# Altium PCB ESP32_DevBoard_T.PcbDoc
Units mm, origin at the board's own origin, x right, y up, seen from the top; angles counter-clockwise.
Board outline 118.7 x 64.5 mm, 2 copper layers (Top Layer, Bottom Layer); 62 components, 59 nets, 233 pads, 63 vias.
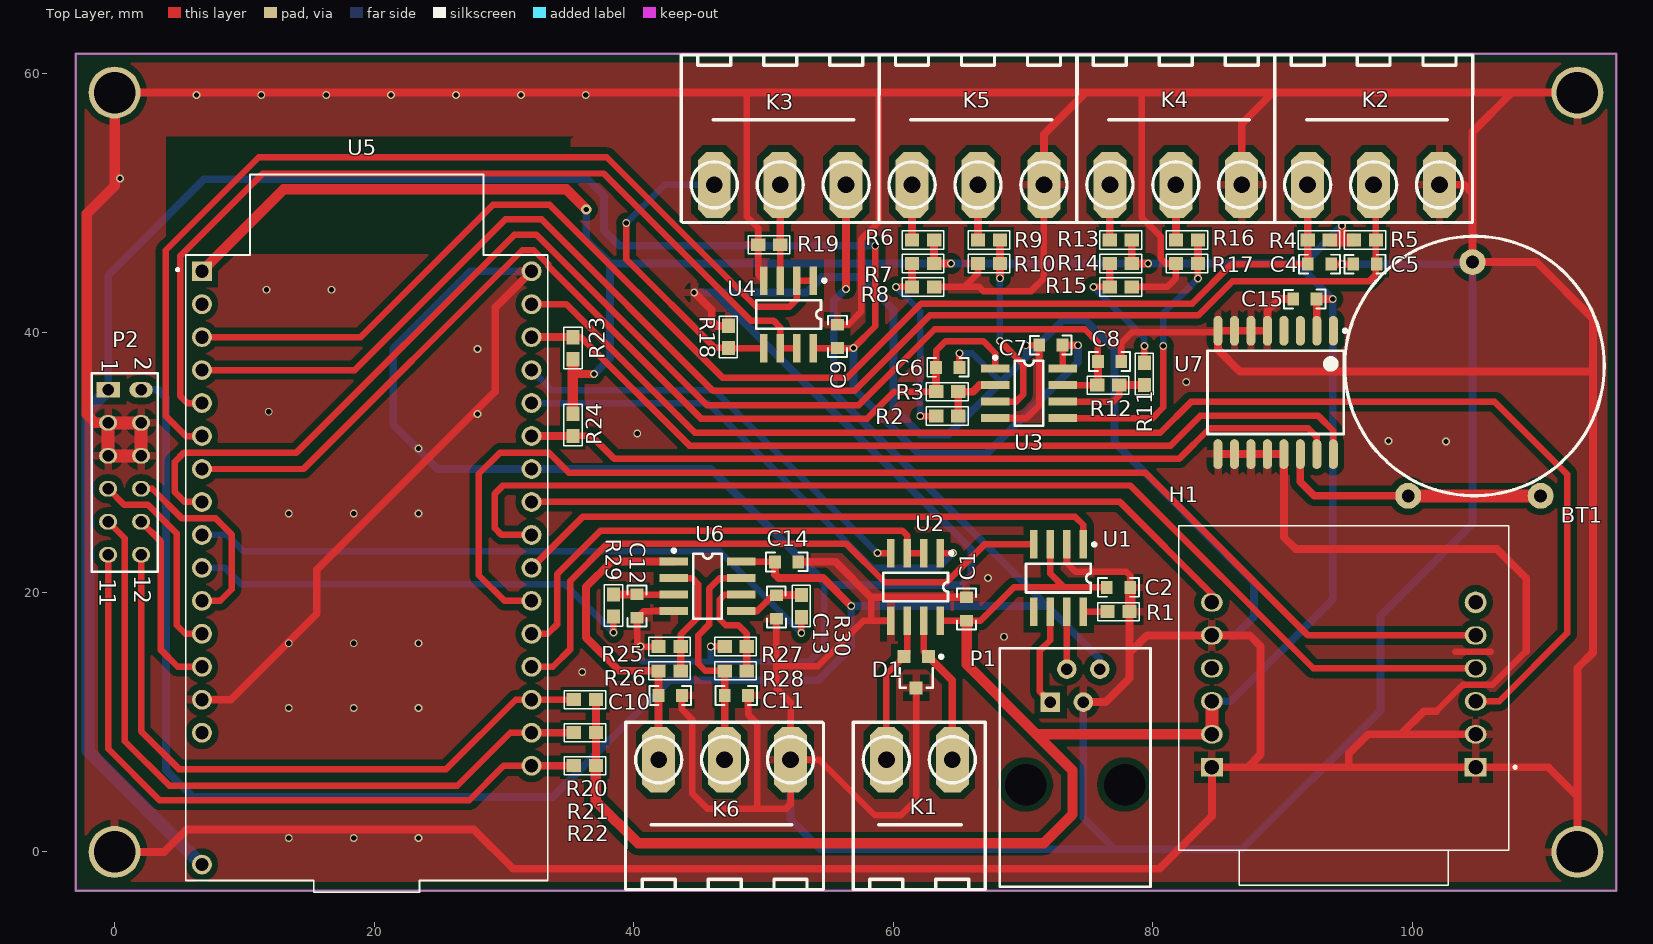
[diagram p0: Top Layer view]
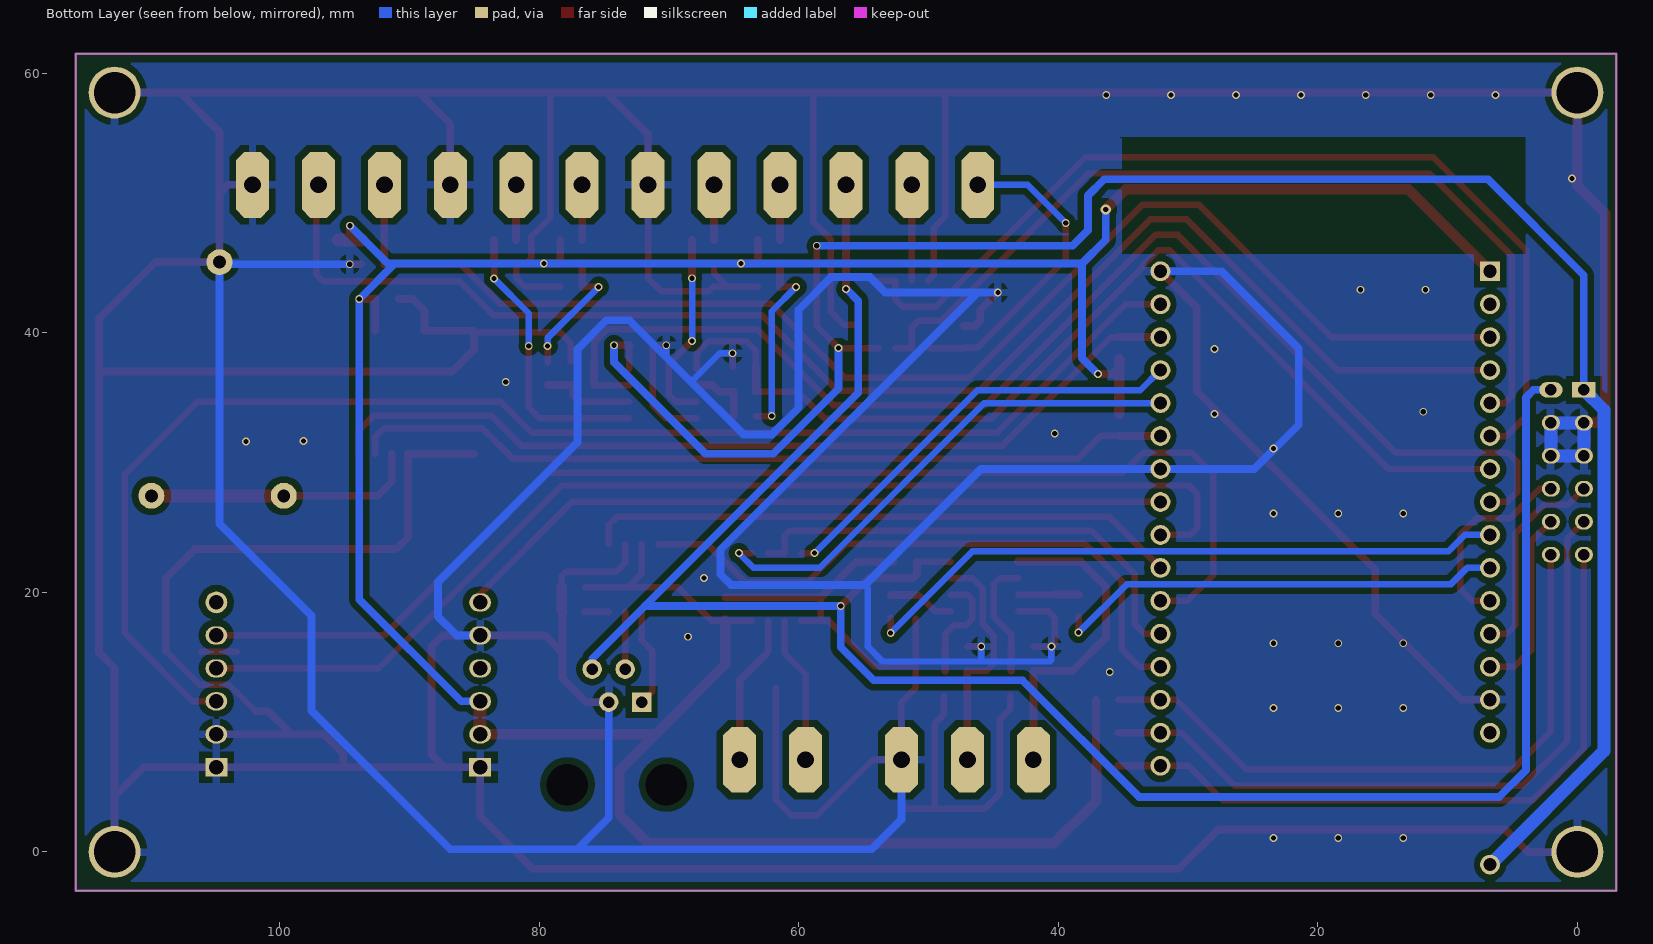
[diagram p1: Bottom Layer view, seen from below]
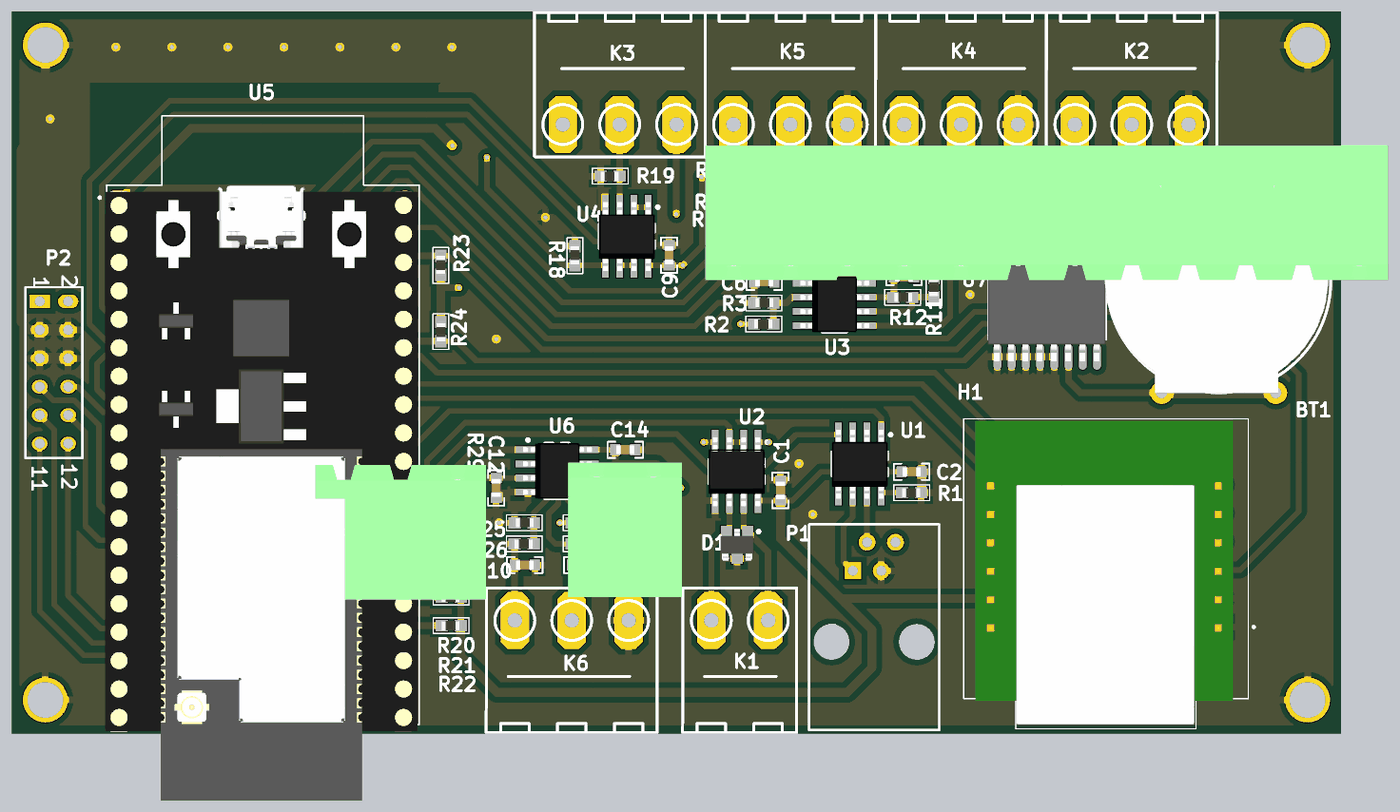
[diagram p2: 3D render of the assembled board from above, using the file's embedded part models]

## Layer stack, top to bottom
Top Layer: signal copper 0.0356
Dielectric: dielectric 0.32, FR-4, Dk 4.8
Bottom Layer: signal copper 0.0356

## Board outline
-3,-3 -3,61.5 115.7,61.5 115.7,-3

## Design rules (kind name [scope] priority, off if disabled: settings)
Clearance [All] p1: gap=0.5
PlaneConnect [All] p1: planeconnectstyle=Relief reliefexpansion=0.508 reliefentries=4 reliefconductorwidth=0.6 reliefairgap=0.254
PolygonConnect [All] p1: connectstyle=Relief reliefconductorwidth=0.6 reliefentries=4 polygonreliefangle="90 Angle"
RoutingVias [All] p1: holewidth=0.711 width=1.27 viastyle="Through Hole" minholewidth=0.711 minwidth=1.27 maxholewidth=0.711 maxwidth=1.27
SilkscreenOverComponentPads [All] p1: minsilkscreentomaskgap=0.254
SolderMaskExpansion [All] p1: expansion=0.102
TestPointUsage [All] p1: valid=0 allowmultiple=FALSE
Testpoint [All] p1: side=15 testpointundercomponent=TRUE minsize=1.016 maxsize=2.54 preferedsize=1.524 minholesize=0 maxholesize=1.016 preferedholesize=0.813 testpointgrid=0.025 style=1023 order=0123456789
Width [All] p1: maxlimit=1 minlimit=0.254 preferedwidth=0.6
22 further rules are at their usual default settings.

## Classes and differential pairs
component class Communication: C1 C2 C3 D1 H1 K1 P1 R1 U1 U2
component class Connector: P2
component class Input_Analog: C4 C5 C6 C7 C8 C9 D2 D3 K2 K3 K4 K5 R2 R3 R4 R5 R6 R7 R8 R9 R10 R11 R12 R13 R14 R15 R16 R17 R18 R19 U3 U4
component class Module_Esp32: R20 R21 R22 R23 R24 U5
component class Output_Analog: C10 C11 C12 C13 C14 K6 R25 R26 R27 R28 R29 R30 U6
component class Peripheral: BT1 C15 U7

## Components (designator, comment, footprint, x,y, rotation, side; value= is the part's Value field where it differs from the comment)
BT1 "CR2032" CR2032 104.77,37.44 r90 top
C1 "100nF/6.3V" CAP0603W 65.64,18.72 r270 top
C2 "100nF/6.3V" CAP0603W 77.35,20.38 r180 top
C4 "100nF/6.3V" CAP0603W 92.828,45.289 r0 top
C5 "100nF/6.3V" CAP0603W 96.334,45.279 r180 top
C6 "?nF/6.3V" CAP0603W 64.19,37.34 r0 top
C7 "100nF/6.3V" CAP0603W 72.13,39.04 r180 top
C8 "?nF/6.3V" CAP0603W 76.66,37.78 r0 top
C9 "100nF/6.3V" CAP0603W 55.69,39.72 r90 top
C10 "1uF/6.3V" CAP0603W 42.81,12.05 r180 top
C11 "1uF/6.3V" CAP0603W 47.9,12.05 r180 top
C12 "1uF/6.3V" CAP0603W 40.25,18.94 r90 top
C13 "1uF/6.3V" CAP0603W 50.98,18.87 r90 top
C14 "100nF/6.3V" CAP0603W 51.78,22.35 r0 top
C15 "100nF/6.3V" CAP0603W 91.7,42.59 r180 top
D1 "SM712" "SOT23 - BC8X6" 61.76,13.84 r180 top
H1 "WIZ850IO" WIZ850IO 95,11.272 r180 top
K1 "2EDGR-5.08-02P" CON_DG129_02P 62,7.1 r0 top
K2 "2EDGR-5.08-03P" CON_DG129_03P 97,51.4 r180 top
K3 "2EDGR-5.08-03P" CON_DG129_03P 51.28,51.4 r180 top
K4 "2EDGR-5.08-03P" CON_DG129_03P 81.76,51.4 r180 top
K5 "2EDGR-5.08-03P" CON_DG129_03P 66.52,51.4 r180 top
K6 "2EDGR-5.08-03P" CON_DG129_03P 47,7.1 r0 top
P1 "RJ12 Jack" rj12_90deg_con_4p4c 74,9.636 r0 top
P2 "Header 6X2" HDR2X6 -0.5,35.6 r270 top
R1 "10K" RES1608[0603] 77.35,18.51 r180 top
R2 "?K" RES1608[0603] 64.15,33.58 r180 top
R3 "?K" RES1608[0603] 64.15,35.46 r0 top
R4 "10K" RES1608[0603] 92.778,47.14 r180 top
R5 "10K" RES1608[0603] 96.334,47.14 r0 top
R6 "?K" RES1608[0603] 62.29,47.14 r0 top
R7 "?K" RES1608[0603] 62.29,45.335 r0 top
R8 "?K" RES1608[0603] 62.29,43.53 r180 top
R9 "?K" RES1608[0603] 67.37,47.14 r180 top
R10 "?K" RES1608[0603] 67.37,45.335 r0 top
R11 "?K" RES1608[0603] 79.34,36.83 r90 top
R12 "?K" RES1608[0603] 76.55,35.96 r0 top
R13 "?K" RES1608[0603] 77.52,47.14 r0 top
R14 "?K" RES1608[0603] 77.52,45.335 r0 top
R15 "?K" RES1608[0603] 77.52,43.53 r180 top
R16 "?K" RES1608[0603] 82.62,47.14 r180 top
R17 "?K" RES1608[0603] 82.62,45.335 r0 top
R18 "165R" RES1608[0603] 47.29,39.68 r90 top
R19 "165R" RES1608[0603] 50.43,46.78 r180 top
R20 "4K7" RES1608[0603] 36.23,11.73 r180 top
R21 "4K7" RES1608[0603] 36.23,9.185 r180 top
R22 "4K7" RES1608[0603] 36.23,6.64 r180 top
R23 "4K7" RES1608[0603] 35.31,38.81 r90 top
R24 "4K7" RES1608[0603] 35.31,32.9 r270 top
R25 "4K7" RES1608[0603] 42.76,15.82 r0 top
R26 "10K" RES1608[0603] 42.76,13.95 r180 top
R27 "4K7" RES1608[0603] 47.85,15.82 r0 top
R28 "10K" RES1608[0603] 47.85,13.95 r180 top
R29 "4K7" RES1608[0603] 38.43,18.99 r90 top
R30 "4K7" RES1608[0603] 52.91,18.94 r90 top
U1 "SN65HVD230" SO8 72.72,21.09 r180 top
U2 "SN65HVD10" SO8 61.71,20.42 r180 top
U3 "LM358AD" SO8 70.45,35.33 r270 top
U4 "LM358AD" SO8 51.924,41.418 r180 top
U5 "ESP32-DEVKITC-32U" MODULE_ESP32-DEVKITC-32U 19.424,21.892 r0 top
U6 "LM358AD" SO8 45.69,20.46 r270 top
U7 "DS3231" SOIC16 89.452,35.4 r270 top

## Footprints (in the part's own frame and the unit in brackets; to place one, negate y for a bottom-side part, rotate by r counter-clockwise, add the part's x,y. Pads: shape width x height; smd on the part's side, far side on the other; paste and mask are expansions set on the pad)
CAP0603W [mm] "capacitor 0603 wave soldering"
  rect 0.9x1 smd: 1(-0.9,0) 2(0.9,0)
  silkscreen extent -1.58,-0.73 1.59,0.72, body extent -0.8,-0.4 0.8,0.4, height 0.3
CON_DG129_02P [mm] "Klemens 2'li"
  oct 2.54x5.08 hole 1.3: 1(2.54,0) 2(-2.54,0)
  silkscreen extent -5.1,-10 5.08,2.9, body extent -5.15,-9.9 5.01,2.1, height 8.6
CON_DG129_03P [mm] "Klemens 3'lü"
  oct 2.54x5.08 hole 1.3: 1(5.08,0) 2(0,0) 3(-5.08,0)
  silkscreen extent -7.64,-10 7.62,2.9, body extent -7.65,-10.13 7.59,1.88, height 8.6
CR2032 [mm] "3V Battery"
  round 2 hole 1: 1(-10,-5.1) 1(-10,5.1) 2(8,0.15)
  silkscreen extent -10,-10 10,10, body extent -10.05,-9.8 10.2,10.2, height 2.97
HDR2X6 [mm]
  rect 1.2x1.8 hole 0.9: 1(0,0)
  oval 1.2x1.8 hole 0.9: 2(0,2.54)
  oval 1.2x1.4 hole 0.9: 3(2.54,0) 4(2.54,2.54) 5(5.08,0) 6(5.08,2.54) 7(7.62,0) 8(7.62,2.54) 9(10.16,0) 10(10.16,2.54) 11(12.7,0) 12(12.7,2.54)
  silkscreen extent -1.27,-1.27 14,3.81
MODULE_ESP32-DEVKITC-32U [mm]
  rect 1.53x1.53 hole 1.02: 1(-12.7,22.85)
  round 1.53 hole 1.02: 2(-12.7,20.31) 3(-12.7,17.77) 4(-12.7,15.23) 5(-12.7,12.69) 6(-12.7,10.15) 7(-12.7,7.61) 8(-12.7,5.07) 9(-12.7,2.53) 10(-12.7,-0.01) 11(-12.7,-2.55) 12(-12.7,-5.09) 13(-12.7,-7.63) 14(-12.7,-10.17) 15(-12.7,-12.71) 19(-12.7,-22.87) 23(12.7,-15.25) 24(12.7,-12.71) 25(12.7,-10.17) 26(12.7,-7.63) 27(12.7,-5.09) 28(12.7,-2.55) 29(12.7,-0.01) 30(12.7,2.53) 31(12.7,5.07) 32(12.7,7.61) 33(12.7,10.15) 34(12.7,12.69) 35(12.7,15.23) 36(12.7,17.77) 37(12.7,20.31) 38(12.7,22.85)
  silkscreen extent -14.67,-25 13.95,30.3, body extent -14.09,-25.21 13.81,29.71, height 7.95
RES1608[0603] [mm] "Chip Capacitor; Body 1.6 x 0.8 mm (LxW typ)"
  rect 1.1x1 smd: 1(-0.85,0) 2(0.85,0)
  silkscreen extent -1.6,-0.7 1.6,0.7, body extent -0.75,-0.41 0.85,0.44, height 0.6
rj12_90deg_con_4p4c [mm] "CONNECTOR, RJ12 90 Degree, PCB Type"
  rect 1.5x1.5 hole 0.9: 1(-1.905,1.905)
  round 1.5 hole 0.9: 2(-0.635,4.445) 3(0.635,1.905) 4(1.905,4.445)
  round 0 hole 3.2 unplated: ""(-3.81,-4.445) ""(3.81,-4.445)
  silkscreen extent -5.81,-12.32 5.81,6.05
SO8 [mm]
  rect 0.6x2.2 smd: 1(-1.905,-2.6) 2(-0.635,-2.6) 3(0.635,-2.6) 4(1.905,-2.6) 5(1.905,2.6) 6(0.635,2.6) 7(-0.635,2.6) 8(-1.905,2.6)
  silkscreen extent -2.88,-2.72 2.5,1.1, body extent -2.5,-3.05 2.5,3.12, height 2
SOIC16 [mm] "SOIC, 16-Leads, Body 10.3x7.5mm, Pitch 1.27mm, IPC Low Density"
  oval 2.3x0.7 smd: 1(-4.75,4.445) 2(-4.75,3.175) 3(-4.75,1.905) 4(-4.75,0.635) 5(-4.75,-0.635) 6(-4.75,-1.905) 7(-4.75,-3.175) 8(-4.75,-4.445) 9(4.75,-4.445) 10(4.75,-3.175) 11(4.75,-1.905) 12(4.75,-0.635) 13(4.75,0.635) 14(4.75,1.905) 15(4.75,3.175) 16(4.75,4.445)
  silkscreen extent -4.87,-5.25 3.2,5.47, body extent -5.47,-5.3 5.17,5.2, height 2.62
"SOT23 - BC8X6" [mm] "SOT-23; 3 Leads; Body 3.0 x 2.5 mm, inc. leads (LxW max)"
  rect 1x1 smd: 1(-0.95,-1.2) 2(0.95,-1.2) 3(0,1.2)
  silkscreen extent -2.05,-1.32 1.28,1.2, body extent -1.5,-1.44 1.5,1.4, height 1.2
WIZ850IO [mm]
  rect 1.68x1.4 hole 1.12: 1(-9.86,4.75) 7(10.46,4.75)
  oval 1.68x1.4 hole 1.12: 2(-9.86,2.21) 3(-9.86,-0.33) 4(-9.86,-2.87) 5(-9.86,-5.41) 8(10.46,2.21) 9(10.46,-0.33) 10(10.46,-2.87) 11(10.46,-5.41) 12(10.46,-7.95)
  round 1.68 hole 1.12: 6(-9.86,-7.95)
  silkscreen extent -13,-13.85 13,13.85, body extent -11.05,-13.65 11.95,13.45, height 17.9

## Part data
BT1: library part BATTERY_CR2032, "BATTERY CR2032 HORIZONTAL 3PIN"
C1 C2 C4 C5 C6 C7 C8 C9 C10 C11 C12 C13 C14 C15: library part CAP1, "CAPACITOR 0603 Case"
D1: "DIODE TVS Array For Rs485"
H1: "Ethernet - 10/100 Base-T/TX PHY SPI Interface Module"
K1: library part KLEMENS_2P, "CONNECTOR 5.08mm 2PIN 90DEG"
K2 K3 K4 K5 K6: library part KLEMENS_3P, "CONNECTOR 5.08mm 3PIN 90DEG"
P1: library part RJ12_4P4C, "CONNECTOR RJ12 Jack, 90 Degree"
P2: "CONNECTOR Header, 6-Pin, Dual row"
R1 R2 R3 R4 R5 R6 R7 R8 R9 R10 R11 R12 R13 R14 R15 R16 R17 R18 R19 R23 R24 R25 R26 R27 R28 R29 R30: library part RES, "RESISTOR 0603 Case %1"
R20 R21 R22: library part RES, "RESISTOR 0805 Case %1"
U1: "CAN Interface IC 3.3V CAN Transceiver"
U2: library part 75176, "IC SN65HVD10DR SMD SOIC8"
U3 U6: "OPAMP Low-Power Dual Operational Amplifier"
U4: "Low-Power Dual Operational Amplifier"
U5: "ESP32-DEVKITC"
U7: library part RTC_DS3231, "IC DS3231SN RTC W/TCXO 16-SOIC MAXIM"

## Free pads (board coordinates)
  round 4 hole 3.2: 4(0,0) 4(0,58.5) 4(112.7,0) 4(112.7,58.5)

## Via types
v1: diameter 0.6, hole 0.4, Top Layer to Bottom Layer, 62 vias
v2: diameter 0.8, hole 0.4, Top Layer to Bottom Layer, 1 vias

## Nets (pads, with @x,y where several pads share a name; then routed paths per layer and width w, separated by ;. In a path a pad name is that pad's centre, name@x,y a point inside that pad or via, vN(x,y) a via of type N, cw(c..) or ccw(c..) an arc to the next point about the centre after c; other vN are vias at no path point)
5V: C7.1 C9.1 P2.1 U3.8 U4.8 U5.19 | length 156.9
  Top Layer w0.5: U4.8 53.831,38.82 C9.1 v1(56.92,38.82) 58.61,40.51 v1(58.61,46.7) ; C7.1 73.05,39.02 U3.8
  Top Layer w0.6: C7.1 v1(74.22,39.04)
  Bottom Layer w0.6: P2.1 -0.5,44.43 6.89,51.82 36.46,51.82 37.71,50.57 37.71,47.89 38.9,46.7 v1(58.61,46.7) ; v1(56.92,38.82) 56.92,35.72 61.96,30.68 67.17,30.68 74.22,37.73 v1(74.22,39.04)
  Bottom Layer w1: P2.1 -2.046,34.054 -2.046,7.792 U5.19
24V: C14.1 K3.3 P1.4 P2.2 U6.8 | length 164.2
  Top Layer w0.5: U6.8 50.865,22.365 C14.1
  Top Layer w0.6: C14.1 50.88,21.38 51.15,21.11 54.58,21.11 v1(56.75,18.94) ; v1(56.34,43.38) 56.34,51.38 K3.3
  Bottom Layer w0.6: P2.2 3.37,35.6 3.96,35.01 3.96,6.3 6.02,4.24 33.78,4.24 42.76,13.22 54.2,13.22 56.75,15.77 v1(56.75,18.94) 71.85,18.94 ; v1(56.34,43.38) 55.41,42.45 55.41,35.38 71.85,18.94 ; P1.4 75.905,14.885 71.85,18.94
GND: BT1.2 C1.1 C2.1 C4.2 C5.2 C6.2 C7.2 C8.2 C9.2 C10.1 C11.1 C12.1 C13.1 C14.2 C15.2 D1.3 H1.1 H1.2 H1.7 H1.11 K2.3 K4.3 K5.3 K6.1 P1.3 P2.3 P2.4 P2.5 P2.6 pad.4 R1.1 R8.1 R10.1 R15.1 R17.1 R18.2 R19.2 R25.1 R27.1 U1.2 U2.5 U3.4 U4.4 U5.14 U5.32 U5.38 U6.4 U7.5 U7.6 U7.7 U7.8 U7.9 U7.10 U7.11 U7.12 U7.13 | length 1064.5
  Top Layer w0.5: R25.1 v1(40.52,15.82) 40.25,16.09 C12.1 40.765,18.555 U6.4 ; C10.1 43.71,10.99 44.49,10.21 44.49,4.51 45.66,3.34 49.46,3.34 ; v1(45.93,15.83) 46.99,15.83 R27.1 ; 48.63,58.5 48.72,58.41 48.72,48.93 49.58,48.07 R19.2 49.58,44.457 U4.4 ; C11.1 48.8,10.59 49.53,9.86 49.53,3.41 49.46,3.34 ; C13.1 50.98,14.3 ; C9.2 56.52,40.62 57.51,41.61 57.51,47.18 58.89,48.56 58.89,58.5 ; 58.27,19.62 58.28,19.61 58.28,17.82 ; U2.5 58.28,17.82 ; D1.3 61.76,4.01 60.58,2.83 58.56,2.83 54.29,7.1 K6.1 ; R8.1 65.47,43.53 ; C6.2 v1(65.09,38.42) ; R10.1 66.52,44.58 65.47,43.53 ; U3.4 70.255,33.425 71.23,34.4 C7.2 v1(70.2,39.04) ; K5.3 71.6,44.2 70.61,43.21 66.93,43.21 66.61,43.53 65.47,43.53 ; U1.2 73.355,22.275 74.04,21.59 77.93,21.59 78.25,21.27 C2.1 ; C8.2 77.56,39.21 78.4,40.05 84.907,40.05 U7.8 ; R15.1 81.11,43.53 81.77,44.19 R17.1 81.005,45.335 80.6,45.74 80.6,47.42 79.15,48.87 79.15,58.5 ; 101.82,10.84 103.868,12.888 106.168,12.888 108.76,15.48 ; 103.28,15.42 106.03,15.42 ; 49.46,3.34 51.73,3.34 52.08,3.69 K6.1 ; 50.98,14.3 50.98,12.63 52.08,11.53 K6.1 ; 50.98,14.3 54.17,14.3 57.69,17.82 58.28,17.82
  Top Layer w0.6: pad.4@0,0 3.82,0 5.54,1.72 27.69,1.72 30.7,-1.29 80.51,-1.29 84.54,2.74 H1.7 87.312,6.522 ; pad.4@0,58.5 48.63,58.5 58.89,58.5 74.8,58.5 ; U5.14 8.942,11.722 15.58,18.36 15.58,21.73 29.33,35.48 29.33,41.948 U5.38 ; v1(44.65,43.1) 46,41.75 46,40.94 46.41,40.53 R18.2 ; C14.2 55.54,22.35 58.27,19.62 C1.1 ; K5.3 71.6,55.3 74.8,58.5 ; P1.3 76.341,11.541 78.2,13.4 78.2,15.34 ; R1.1 78.2,15.34 ; U7.9 U7.10 U7.11 U7.12 U7.13 90.087,24.253 91,23.34 106.5,23.34 108.76,21.08 108.76,15.48 ; K4.3 86.84,56.11 89.23,58.5 ; C15.2 89.72,42.59 88.817,41.687 U7.5 U7.6 U7.7 U7.8 85.007,38.713 86.7,37.02 113.91,37.02 ; C4.2 93.738,45.279 v1(94.59,45.279) C5.2 ; 101.82,10.84 100.878,10.84 99.1,9.062 ; K2.3 103.99,51.4 104.62,50.77 ; H1.2 99.1,9.062 ; pad.4@112.7,0 112.7,4.29 ; pad.4@112.7,58.5 107.65,58.5 ; 74.8,58.5 79.15,58.5 89.23,58.5 ; 78.2,15.34 79.542,16.682 H1.11 87.448,16.682 88.29,15.84 88.29,7.5 87.312,6.522 ; 87.312,6.522 95.08,6.522 ; 89.23,58.5 107.65,58.5 ; 95.08,6.522 H1.1 110.468,6.522 112.7,4.29 ; 95.08,6.522 95.08,7.56 96.582,9.062 99.1,9.062 ; 104.62,50.77 BT1.2 109.56,45.44 113.91,41.09 113.91,37.02 ; 104.62,50.77 104.62,55.47 107.65,58.5 ; 112.7,4.29 112.7,14.15 113.91,15.36 113.91,37.02
  Top Layer w0.8: P2.3 -1.486,33.06 -2.146,33.72 -2.146,49.164 0,51.31 pad.4@0,58.5 ; R1.1 78.25,18.56 C2.1
  Top Layer w1: P2.5 P2.6 P2.4 P2.3 P2.5
  Bottom Layer w0.5: v1(40.52,15.82) 40.52,14.81 40.66,14.67 53.53,14.67 54.66,15.8 54.66,20.33 54.89,20.56 ; 45.93,14.67 v1(45.93,15.83) ; v1(65.09,38.42) 66.07,38.42 68.225,36.265 68.345,36.265 ; 70.19,38.11 70.2,38.12 v1(70.2,39.04)
  Bottom Layer w0.6: U5.38 27.422,44.742 21.47,38.79 21.47,32.92 24.888,29.502 U5.32 45.948,29.502 54.89,20.56 65.2,20.56 66.03,21.39 66.03,23.28 46.21,43.1 ; v1(44.65,43.1) 46.21,43.1 ; K6.1 52.08,2.5 54.38,0.2 77.07,0.2 ; 70.19,38.11 68.345,36.265 64.25,32.17 62.05,32.17 60,34.22 60,41.78 57.49,44.29 54.51,44.29 53.32,43.1 46.21,43.1 ; 70.2,38.12 73.04,40.96 74.82,40.96 77.04,38.74 77.04,31.55 87.79,20.8 87.79,18.13 86.342,16.682 H1.11 ; P1.3 74.635,2.635 77.07,0.2 ; v1(94.59,45.279) 104.459,45.279 BT1.2 104.62,25.29 97.54,18.21 97.54,10.9 86.84,0.2 77.07,0.2
  Bottom Layer w1: P2.5 P2.6 P2.4 P2.3 P2.5
  other v1: 13.42,16.08 23.42,31.08 27.95,33.74 0.42,51.89 6.3,58.31 11.3,58.31 16.3,58.31 21.3,58.31 26.3,58.31 31.3,58.31 36.3,58.31
NetBT1_1: BT1.1 U7.14 | length 21.1
  Top Layer w0.6: U7.14 91.357,28.513 92.43,27.44 BT1.1@99.67,27.44
  Top Layer w1: BT1.1@99.67,27.44 BT1.1@109.87,27.44
NetC4_1: C4.1 K2.1 R4.2 U5.3 | length 104.7
  Top Layer w0.5: U5.3 18.952,39.662 29.14,49.85 33.53,49.85 46.83,36.55 56.44,36.55 62.13,42.24 83.01,42.24 86.059,45.289 C4.1
  Top Layer w0.6: K2.1 91.928,51.392 C4.1
NetC5_1: C5.1 K2.2 R5.2 U5.4 | length 110.1
  Top Layer w0.5: U5.4 18.492,37.122 30.1,48.73 32.9,48.73 46.11,35.52 56.99,35.52 62.8,41.33 83.48,41.33 86.1,43.95 96.62,43.95 97.184,44.514 K2.2@97.184,49.84
  Top Layer w0.6: K2.2 K2.2@97.184,51.216
NetC6_1: C6.1 R3.1 U3.1 U5.7 | length 79.4
  Top Layer w0.5: U5.7 14.552,29.502 31.41,46.36 32.301,46.36 33.393,45.268 33.393,45.167 45.17,33.39 57.98,33.39 60.05,35.46 R3.1 ; C6.1 63.29,38.61 64.02,39.34 66.94,39.34 67.85,38.43 U3.1
  Top Layer w0.6: C6.1 63.29,35.47 R3.1
NetC8_1: C8.1 R12.1 U3.7 U5.8 | length 97.4
  Top Layer w0.5: U5.8 5.398,26.962 4.63,27.73 4.63,30.05 5.351,30.771 14.011,30.771 30.8,47.56 32.5,47.56 45.63,34.43 57.34,34.43 63.18,40.27 74.74,40.27 75.76,39.25 C8.1 ; U3.7 75.695,35.965 R12.1 R12.1@75.695,35.955
  Top Layer w0.6: R12.1 75.76,36.02 C8.1
NetC10_2: C10.2 K6.3 R26.2 U6.1 | length 25
  Top Layer w0.6: K6.3 41.91,7.11 C10.2 R26.2 38.89,13.95 36.32,16.52 36.32,20.42 38.265,22.365 U6.1
NetC11_2: C11.2 K6.2 R28.2 U6.7 | length 18.1
  Top Layer w0.5: R28.2 45.51,13.95 44.96,14.5 44.96,16.68 45.8,17.52 45.8,20.28 46.615,21.095 U6.7
  Top Layer w0.6: K6.2 C11.2 R28.2
NetC12_2: C12.2 R29.2 U6.3 | length 4.7
  Top Layer w0.5: C12.2 40.265,19.825 U6.3
  Top Layer w0.6: R29.2 C12.2
NetC13_2: C13.2 R30.2 U6.5 | length 5.1
  Top Layer w0.5: U6.5 49.515,18.555 50.73,19.77 C13.2 C13.2@50.975,19.775
  Top Layer w0.6: C13.2 51,19.79 R30.2
NetD1_1: D1.1 K1.1 U2.7 | length 11.6
  Top Layer w0.5: U2.7 62.345,15.405 D1.1
  Top Layer w0.6: D1.1 64.54,13.21 K1.1
NetD1_2: D1.2 K1.2 U2.6 | length 11.4
  Top Layer w0.5: K1.2 59.46,13.69 D1.2 61.075,15.305 U2.6
NetH1_3: H1.3 U5.37 | length 108.7
  Top Layer w0.5: U5.37 34.808,42.202 44.71,32.3 80.56,32.3 82.93,34.67 106.33,34.67 111.91,29.09 111.91,16.84 106.672,11.602 H1.3
NetH1_4: H1.4 U5.30 | length 87.4
  Top Layer w0.5: U5.30 29.808,24.422 29.3,24.93 29.3,27.61 29.921,28.231 78.259,28.231 92.348,14.142 H1.4
NetH1_5: H1.5 U5.28 | length 96.1
  Top Layer w0.5: U5.28@32.22,19.342 30.038,19.342 28.06,21.32 28.06,29.13 29.701,30.771 33.439,30.771 34.98,29.23 79.4,29.23 91.948,16.682 H1.5
NetH1_12: H1.12 U5.31 | length 56
  Top Layer w0.5: U5.31 77.458,26.962 84.54,19.88 H1.12
NetK3_1: K3.1 R18.1 U4.5 | length 24.2
  Top Layer w0.5: v1(39.42,48.46) 39.42,45.66 46.25,38.83 R18.1 ; R18.1@47.29,38.818 U4.5
  Bottom Layer w0.5: v1(39.42,48.46) 42.36,51.4 K3.1
NetK3_2: K3.2 R19.1 U4.3 | length 7.4
  Top Layer w0.5: R19.1 51.289,46.771 U4.3
  Top Layer w0.6: R19.1 K3.2
NetK4_1: K4.1 R13.1 | length 4.3
  Top Layer w0.6: R13.1 76.67,51.39 K4.1
NetK4_2: K4.2 R16.2 | length 4.3
  Top Layer w0.6: K4.2 81.77,51.39 R16.2
NetK5_1: K5.1 R6.1 | length 4.3
  Top Layer w0.6: R6.1 K5.1
NetK5_2: K5.2 R9.2 | length 4.3
  Top Layer w0.6: R9.2 K5.2
NetP1_1: P1.1 U1.6 | length 7.6
  Top Layer w0.5: U1.6 72.085,16.305 71.26,15.48 71.26,12.376 P1.1
NetP1_2: P1.2 U1.7 | length 4.4
  Top Layer w0.5: U1.7 73.355,14.091 P1.2
NetP2_7: P2.7 U5.12 | length 16
  Top Layer w0.5: P2.7 0.73,26.75 2.57,26.75 4.78,24.54 4.78,17.47 5.448,16.802 U5.12
NetP2_8: P2.8 U5.11 | length 15.3
  Top Layer w0.5: P2.8 2.9,27.98 5.189,25.691 7.789,25.691 9.03,24.45 9.03,20.24 8.132,19.342 U5.11
NetP2_9: P2.9 R21.2 U5.24 | length 55.2
  Top Layer w0.5: P2.9 0.78,24.16 0.78,8.53 4.22,5.09 26.39,5.09 30.482,9.182 32.094,9.182 U5.24
  Top Layer w0.6: U5.24@32.094,9.182 32.097,9.185 R21.2
NetP2_10: P2.10 U5.13 | length 14.2
  Top Layer w0.5: P2.10 3.57,23.91 3.57,15.55 4.858,14.262 U5.13
NetP2_11: P2.11 R22.2 U5.23 | length 53.6
  Top Layer w0.5: P2.11 -0.5,7.95 3.46,3.99 27.32,3.99 29.97,6.64 U5.23@32.096,6.64 ; U5.23@32.094,6.642 U5.23
  Top Layer w0.6: U5.23@32.124,6.64 R22.2
NetP2_12: P2.12 R20.2 U5.25 | length 50.4
  Top Layer w0.5: P2.12 2.04,9.29 4.95,6.38 25.56,6.38 30.902,11.722 U5.25 ; U5.25@32.094,11.722 U5.25 ; R20.2 35.372,11.722 U5.25
NetR1_2: R1.2 U1.8 | length 1.9
  Top Layer w0.5: U1.8@74.635,18.48 U1.8 74.645,18.51 R1.2
NetR2_1: R2.1 R3.2 U3.2 | length 5
  Top Layer w0.5: R3.2 R3.2@65.015,35.445
  Top Layer w0.6: R2.1 R3.2 66.13,35.46 66.635,35.965 U3.2
NetR2_2: R2.2 R7.1 R8.2 | length 15
  Top Layer w0.5: v1(60.2,43.53) R8.2 ; v1(62.07,33.58) R2.2
  Top Layer w0.6: R8.2 R7.1
  Bottom Layer w0.5: v1(60.2,43.53) 62.07,41.66 v1(62.07,33.58)
NetR9_1: R9.1 R10.2 U3.3 | length 15
  Top Layer w0.5: U3.3 69.455,34.695 70.01,35.25 70.01,37.56 v1(68.21,39.36)
  Top Layer w0.6: v1(68.22,44.195) R10.2 R9.1
  Bottom Layer w0.5: v1(68.21,39.36) 68.21,44.185 v1(68.22,44.195)
NetR11_1: R11.1 R12.2 U3.6 | length 7.3
  Top Layer w0.5: U3.6 76.935,34.695 77.4,35.16 R12.2
  Top Layer w0.6: R12.2 77.42,35.98 R11.1
NetR11_2: R11.2 R14.1 R15.2 | length 10.5
  Top Layer w0.5: v1(75.41,43.53) R15.2 ; R11.2 v1(79.34,38.99)
  Top Layer w0.6: R15.2 R14.1
  Bottom Layer w0.5: v1(75.41,43.53) 79.34,39.6 v1(79.34,38.99)
NetR16_1: R16.1 R17.2 U3.5 | length 22.1
  Top Layer w0.5: U3.5 79.975,33.425 80.8,34.25 v1(80.8,38.99) ; v1(83.47,44.18) R17.2
  Top Layer w0.6: R17.2 R16.1
  Bottom Layer w0.5: v1(80.8,38.99) 80.8,41.51 v1(83.47,44.18)
NetR23_2: R23.2 U5.36 U7.16 | length 68.4
  Top Layer w0.5: R23.2 35.94,39.66 44.29,31.31 81.37,31.31 83.65,33.59 92.75,33.59 93.897,32.443 U7.16
  Top Layer w0.6: U5.36 35.308,39.662 R23.2
NetR24_2: R24.2 U5.33 U7.15 | length 63.8
  Top Layer w0.5: R24.2 36.74,32.05 38.48,30.31 82.04,30.31 84.37,32.64 91.96,32.64 92.627,31.973 U7.15
  Top Layer w0.6: U5.33@32.124,32.05 R24.2
NetR25_2: R25.2 R26.1 U6.2 | length 9.3
  Top Layer w0.5: U6.2 44.495,21.095 44.96,20.63 44.96,18.1 43.61,16.75 R25.2
  Top Layer w0.6: R26.1 R25.2
NetR27_2: R27.2 R28.1 U6.6 | length 8.8
  Top Layer w0.5: U6.6 47.005,19.825 46.62,19.44 46.62,17.92 47.08,17.46 48.06,17.46 48.7,16.82 R27.2
  Top Layer w0.6: R28.1 R27.2
NetR29_1: R29.1 U5.10 | length 35
  Top Layer w0.5: v1(38.43,16.9) R29.1
  Bottom Layer w0.5: U5.10 8.498,21.882 9.769,20.611 34.719,20.611 v1(38.43,16.9)
NetR30_1: R30.1 U5.9 | length 50.5
  Top Layer w0.5: v1(52.91,16.86) R30.1
  Bottom Layer w0.5: U5.9 8.678,24.422 9.949,23.151 46.619,23.151 v1(52.91,16.86)
NetU1_1: U1.1 U5.29 | length 46
  Top Layer w0.5: U5.29 36.052,25.81 74.02,25.81 74.625,25.205 U1.1 U1.1@74.625,23.835
NetU1_4: U1.4 U5.26 | length 48.2
  Top Layer w0.5: U5.26 33.752,14.262 35.12,15.63 35.12,20.9 37.98,23.76 56.35,23.76 59.34,20.77 64.1,20.77 67.02,23.69 U1.4
NetU2_1: U2.1 U5.34 | length 39.2
  Top Layer w0.5: U2.1 v1(64.605,23.02)
  Bottom Layer w0.5: U5.34 45.698,34.582 58.38,21.9 63.485,21.9 v1(64.605,23.02)
NetU2_2: U2.2 U2.3 U5.27 | length 37.3
  Top Layer w0.5: U5.27 33.372,16.802 34.09,17.52 34.09,21.4 37.45,24.76 60.69,24.76 61.075,24.375 U2.3 U2.2
NetU2_4: U2.4 U5.35 | length 33.5
  Top Layer w0.5: v1(58.775,23.02) U2.4
  Bottom Layer w0.5: U5.35 33.676,35.57 46.225,35.57 v1(58.775,23.02)
NetU4_1: U4.1 U4.2 U5.6 | length 75.5
  Top Layer w0.5: U5.6 5.478,32.042 3.94,33.58 3.94,46.36 11.1,53.52 37.92,53.52 49.44,42 52,42 52.559,42.559 U4.2 U4.1
NetU4_6: U4.6 U4.7 U5.5 | length 69.3
  Top Layer w0.5: U5.5 5.598,34.582 5.04,35.14 5.04,45.89 11.42,52.27 37.68,52.27 49.01,40.94 50.76,40.94 51.289,40.411 U4.6 U4.7
NetU5_16: 
NetU5_17: 
NetU5_18: 
NetU5_20: 
NetU5_21: 
NetU5_22: 
VMCU: C1.2 C2.2 C15.1 H1.8 H1.9 R4.1 R5.1 R6.2 R7.2 R13.2 R14.2 R20.1 R21.1 R22.1 R23.1 R24.1 U1.3 U2.8 U5.1 U7.2 | length 261.8
  Top Layer w0.5: U2.8 C1.2 66.71,17.82 69.27,20.38 73.15,20.38 ; U1.3 72.085,21.445 73.15,20.38 ; C2.2 73.15,20.38
  Top Layer w0.6: 35.31,37.33 35.82,36.82 v1(36.94,36.82) ; R22.1 R21.1 R20.1 ; R6.2 R7.2 v1(64.45,45.335) ; R13.2 R14.2 v1(79.63,45.335) ; C15.1 C15.1@92.627,42.59 ; U7.2 C15.1@92.627,42.59 ; C15.1@92.627,42.65 C15.1@92.627,42.59 ; v1(93.85,42.59) C15.1@92.627,42.59 ; 94.51,47.14 94.57,47.2 v1(94.57,48.24)
  Top Layer w0.8: U5.1 13.032,51.05 34.79,51.05 v2(36.34,49.5) ; R24.1 35.31,37.33 R23.1 ; R22.1 37.08,3.91 40.33,0.66 71.58,0.66 73.8,2.88 73.8,6.28 71.018,9.062 ; C1.2 65.64,14.44 71.018,9.062 ; H1.8 71.018,9.062
  Top Layer w1: H1.8 H1.9 ; R4.1 94.51,47.14 R5.1
  Bottom Layer w0.6: v2(36.34,49.5) 36.34,47.16 38.165,45.335 ; v1(36.94,36.82) 38.165,38.045 38.165,45.335 ; H1.9 86.002,11.602 93.85,19.45 v1(93.85,42.59) 91.105,45.335 ; v1(94.57,48.24) 91.665,45.335 91.105,45.335 ; 38.165,45.335 v1(64.45,45.335) v1(79.63,45.335) 91.105,45.335
pads on no net: H1.6 H1.10 P1. U1.5 U5.2 U5.15 U7.1 U7.3 U7.4
copper on no net:
  other v1: 13.42,1.08 18.42,1.08 23.42,1.08 13.42,11.08 18.42,11.08 23.42,11.08 36.03,13.86 18.42,16.08 23.42,16.08 68.52,16.58 67.29,21.11 13.42,26.08 18.42,26.08 23.42,26.08 102.57,31.61 98.15,31.67 40.27,32.24 11.88,33.91 82.57,36.21 27.95,38.74 11.7,43.31 16.7,43.31

## Polygon pours and split planes (outlines as drawn)
GND on Top Layer "top_GND" (solid, pour order 1000): -3,61.5 115.7,61.5 115.7,-3 -3,-3
GND on Bottom Layer "bot_GND" (solid, pour order 1001): -3,-3 115.7,-3 115.7,61.5 -3,61.5

## Keep-outs
Keep-Out Layer:
  the board outline again, w0.2

## Other copper
Multi-Layer:
  pour cut-out: 3.96,55.12 3.96,46.06 35.11,46.06 35.11,54.9 35.33,55.12

## Text inside footprints (layer, text, board x,y; h text height)
P2: Top Overlay "2" at 1.532,38.14 h1.27 r270; Top Overlay "1" at -1,38 h1.27 r270; Top Overlay "11" at -1.15,21.1 h1.27 r270; Top Overlay "12" at 1.5,21.3 h1.27 r270